# EAGLE board proto_shield_for_v1.3 (EAGLE 5.04)
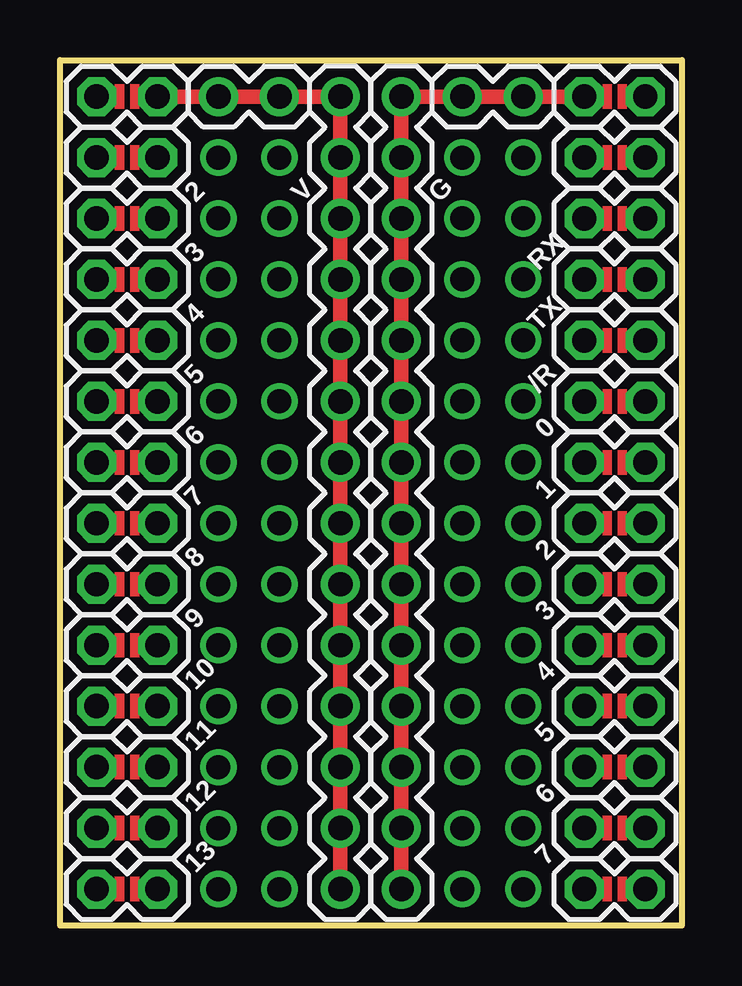
[diagram p0: board, top side]
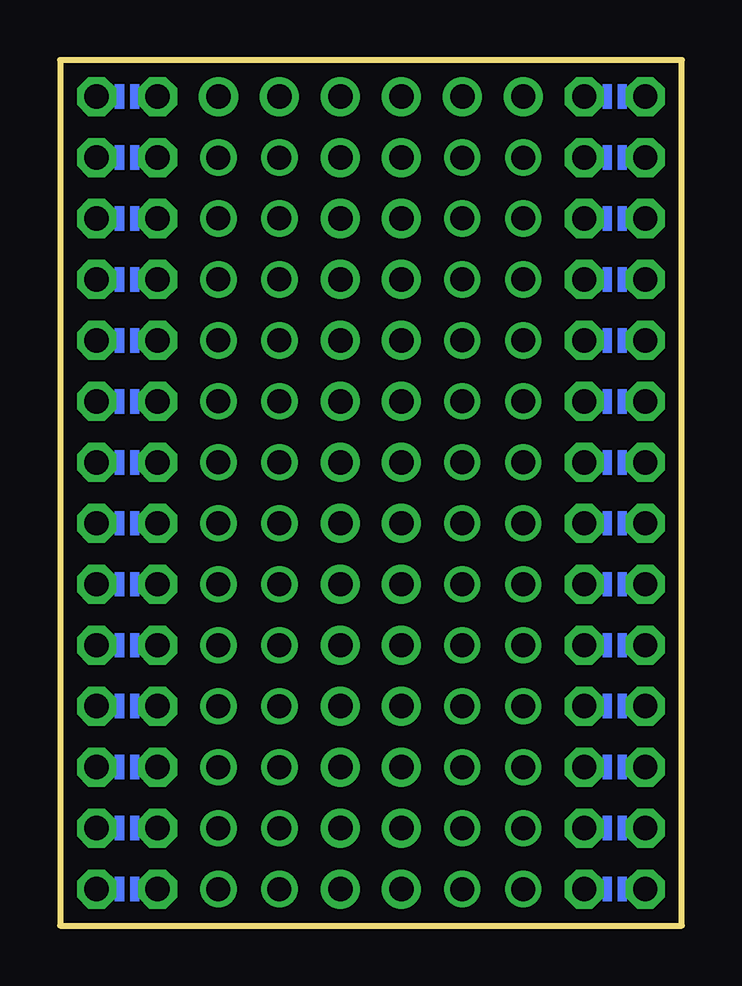
[diagram p1: board, bottom side, seen from below]

Size 25.91 x 36.07 mm. Coordinates in mm from the lower left corner, seen from the top.
Outline: 0,0 0,36.07 25.91,36.07 25.91,0 0,0
Copper layers (1*16): Top 0.035mm / dielectric 1.5mm / Bottom 0.035mm
Design rules "SparkFun *": minimum track width 8mil, minimum drill 20mil, track to track 8mil, track to pad 8mil, pad to pad 8mil, via to via 8mil, smd to smd 8mil, copper to edge 10mil, drill to drill 8mil, minimum pad ring 12mil, minimum via ring 10mil, stop-mask expansion 4mil, vias tented up to drill 25mil, thermal gap 10mil

## Footprints (pad centres in the part's own frame; a part is rotated, then mirrored left to right if it is on the bottom)
1X14 = drill 1.016 round: 1 0,0; 2 2.54,0; 3 5.08,0; 4 7.62,0; 5 10.16,0; 6 12.7,0; 7 15.24,0; 8 17.78,0; 9 20.32,0; 10 22.86,0; 11 25.4,0; 12 27.94,0; 13 30.48,0; 14 33.02,0
1X02 = drill 1.016 round: 1 0,0; 2 2.54,0
1X02' = drill 1.016 octagon: 1 -1.27,0; 2 1.27,0

## Placement (x,y rotation side)
JP5  M14  [1X14]  11.68,34.54 270 top
JP6  M14  [1X14]  14.22,34.54 270 top
JP8  [1X02]  9.14,34.54 180 top
JP9  [1X02]  16.76,34.54 0 top
SJ1  1X02-SJ  [1X02']  2.79,34.54 0 top
SJ2  1X02-SJ  [1X02']  2.79,32 0 top
SJ3  1X02-SJ  [1X02']  2.79,29.46 0 top
SJ4  1X02-SJ  [1X02']  2.79,26.92 0 top
SJ5  1X02-SJ  [1X02']  2.79,24.38 0 top
SJ6  1X02-SJ  [1X02']  2.79,21.84 0 top
SJ7  1X02-SJ  [1X02']  2.79,19.3 0 top
SJ8  1X02-SJ  [1X02']  2.79,16.76 0 top
SJ9  1X02-SJ  [1X02']  2.79,14.22 0 top
SJ10  1X02-SJ  [1X02']  2.79,11.68 0 top
SJ11  1X02-SJ  [1X02']  2.79,9.14 0 top
SJ12  1X02-SJ  [1X02']  2.79,6.6 0 top
SJ13  1X02-SJ  [1X02']  2.79,4.06 0 top
SJ14  1X02-SJ  [1X02']  2.79,1.52 0 top
SJ15  1X02-SJ  [1X02']  23.11,34.54 0 top
SJ16  1X02-SJ  [1X02']  23.11,32 0 top
SJ17  1X02-SJ  [1X02']  23.11,29.46 0 top
SJ18  1X02-SJ  [1X02']  23.11,26.92 0 top
SJ19  1X02-SJ  [1X02']  23.11,24.38 0 top
SJ20  1X02-SJ  [1X02']  23.11,21.84 0 top
SJ21  1X02-SJ  [1X02']  23.11,19.3 0 top
SJ22  1X02-SJ  [1X02']  23.11,16.76 0 top
SJ23  1X02-SJ  [1X02']  23.11,14.22 0 top
SJ24  1X02-SJ  [1X02']  23.11,11.68 0 top
SJ25  1X02-SJ  [1X02']  23.11,9.14 0 top
SJ26  1X02-SJ  [1X02']  23.11,6.6 0 top
SJ27  1X02-SJ  [1X02']  23.11,4.06 0 top
SJ28  1X02-SJ  [1X02']  23.11,1.52 0 top

## Library data of the parts
JP5 JP6 JP8 JP9 = SparkFun
SJ1-SJ28 = kotobuki

## Nets
N$14: JP5.1 JP5.2 JP5.3 JP5.4 JP5.5 JP5.6 JP5.7 JP5.8 JP5.9 JP5.10 JP5.11 JP5.12 JP5.13 JP5.14 JP8.1 JP8.2 SJ1.2
N$15: JP6.1 JP6.2 JP6.3 JP6.4 JP6.5 JP6.6 JP6.7 JP6.8 JP6.9 JP6.10 JP6.11 JP6.12 JP6.13 JP6.14 JP9.1 JP9.2 SJ15.1

## Tracks (layer width: path | path; a pad name or v marks a point on that pad's centre or on a via)
N$1  (via drill 1)
  other vias: 6.6,21.84
N$2  (via drill 1)
  other vias: 6.6,29.46
N$3  (via drill 1)
  other vias: 9.14,29.46
N$4  (via drill 1)
  other vias: 16.76,29.46
N$5  (via drill 1)
  other vias: 19.3,29.46
N$6  (via drill 1)
  other vias: 9.14,21.84
N$8  (via drill 1)
  other vias: 6.6,26.92
N$9  (via drill 1)
  other vias: 9.14,26.92
N$11  (via drill 1)
  other vias: 6.6,24.38
N$12  (via drill 1)
  other vias: 9.14,24.38
N$14
  Top 0.61: JP5.14 JP5.13 JP5.12 JP5.11 JP5.10 JP5.9 JP5.8 JP5.7 JP5.6 JP5.5 JP5.4 JP5.3 JP5.2 JP5.1 JP8.1 JP8.2 SJ1.2
N$15
  Top 0.61: JP6.14 JP6.13 JP6.12 JP6.11 JP6.10 JP6.9 JP6.8 JP6.7 JP6.6 JP6.5 JP6.4 JP6.3 JP6.2 JP6.1 JP9.1 JP9.2 SJ15.1
N$17  (via drill 1)
  other vias: 6.6,19.3
N$18  (via drill 1)
  other vias: 9.14,19.3
N$20  (via drill 1)
  other vias: 6.6,16.76
N$21  (via drill 1)
  other vias: 9.14,16.76
N$23  (via drill 1)
  other vias: 6.6,14.22
N$24  (via drill 1)
  other vias: 9.14,14.22
N$26  (via drill 1)
  other vias: 6.6,11.68
N$27  (via drill 1)
  other vias: 9.14,11.68
N$29  (via drill 1)
  other vias: 6.6,9.14
N$30  (via drill 1)
  other vias: 9.14,9.14
N$32  (via drill 1)
  other vias: 6.6,6.6
N$33  (via drill 1)
  other vias: 9.14,6.6
N$35  (via drill 1)
  other vias: 6.6,4.06
N$36  (via drill 1)
  other vias: 9.14,4.06
N$38  (via drill 1)
  other vias: 6.6,1.52
N$39  (via drill 1)
  other vias: 9.14,1.52
N$40  (via drill 1)
  other vias: 16.76,26.92
N$41  (via drill 1)
  other vias: 19.3,26.92
N$43  (via drill 1)
  other vias: 16.76,24.38
N$44  (via drill 1)
  other vias: 19.3,24.38
N$46  (via drill 1)
  other vias: 16.76,21.84
N$47  (via drill 1)
  other vias: 19.3,21.84
N$49  (via drill 1)
  other vias: 16.76,19.3
N$50  (via drill 1)
  other vias: 19.3,19.3
N$52  (via drill 1)
  other vias: 16.76,16.76
N$53  (via drill 1)
  other vias: 19.3,16.76
N$55  (via drill 1)
  other vias: 16.76,14.22
N$56  (via drill 1)
  other vias: 19.3,14.22
N$58  (via drill 1)
  other vias: 16.76,11.68
N$59  (via drill 1)
  other vias: 19.3,11.68
N$61  (via drill 1)
  other vias: 6.6,32
N$64  (via drill 1)
  other vias: 16.76,6.6
N$65  (via drill 1)
  other vias: 19.3,6.6
N$67  (via drill 1)
  other vias: 16.76,4.06
N$68  (via drill 1)
  other vias: 19.3,4.06
N$70  (via drill 1)
  other vias: 16.76,1.52
N$71  (via drill 1)
  other vias: 19.3,1.52
N$75  (via drill 1)
  other vias: 9.14,32
N$76  (via drill 1)
  other vias: 16.76,32
N$103  (via drill 1)
  other vias: 19.3,32
N$131  (via drill 1)
  other vias: 16.76,9.14
N$132  (via drill 1)
  other vias: 19.3,9.14

## Text on the board
tPlace: 2 | V | G | 3 | RX | 4 | TX | 5 | /R | 6 | 0 | 1 | 7 | 8 | 2 | 9 | 3 | 10 | 4 | 11 | 5 | 6 | 12 | 13 | 7